# EAGLE board Group_08_Chiara (EAGLE 9.6.2)
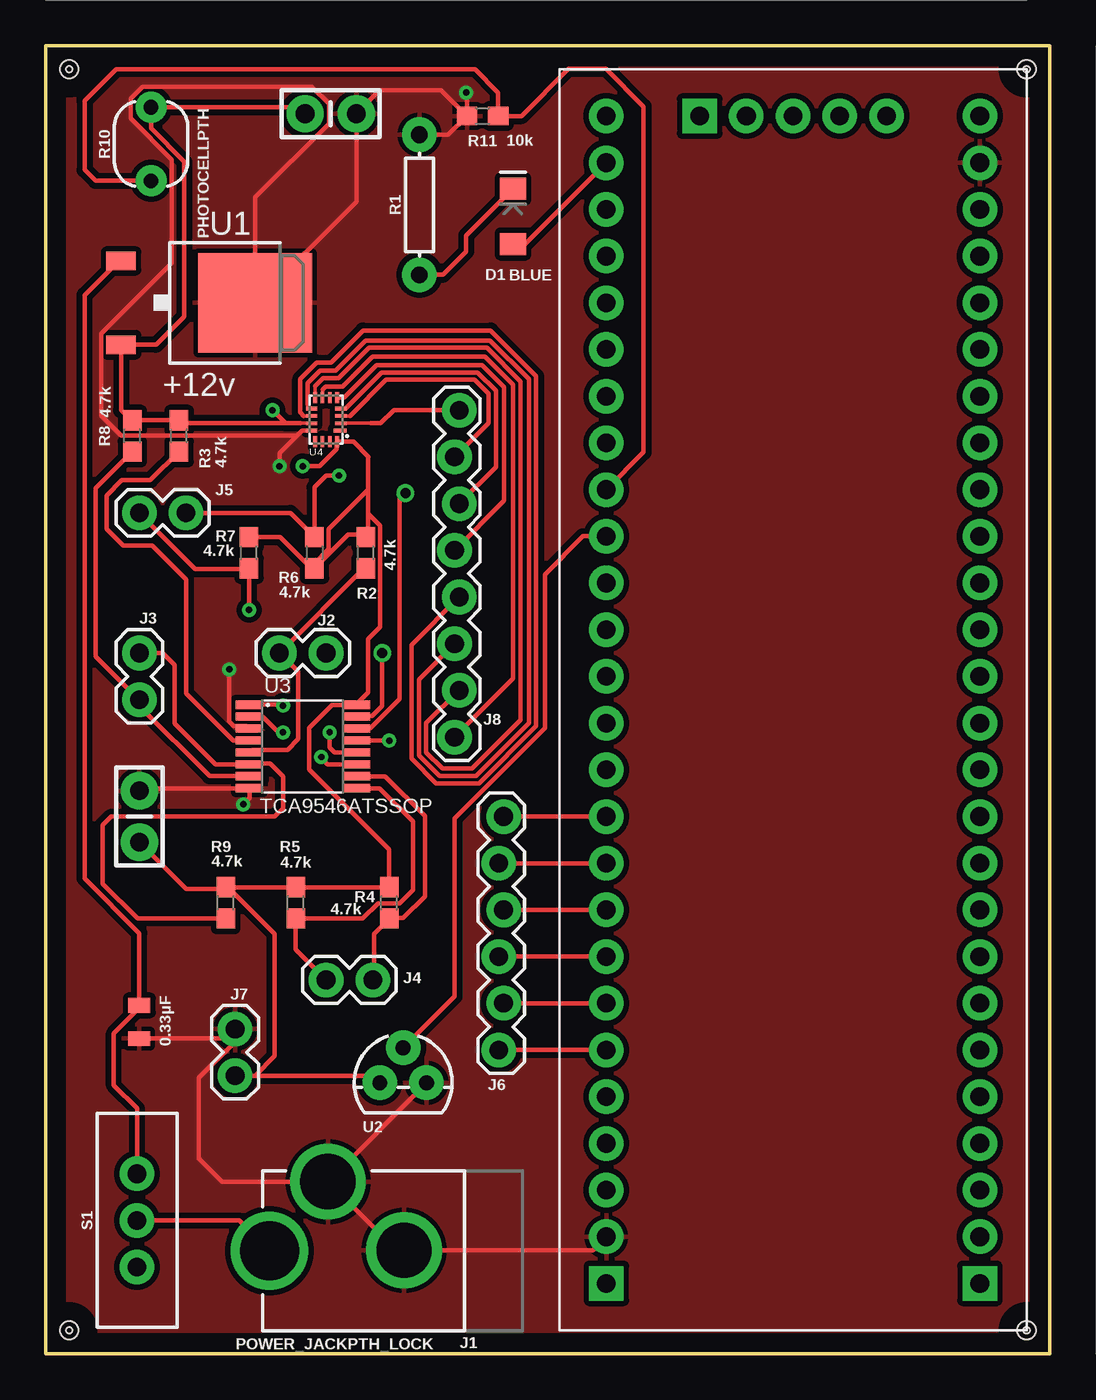
[diagram p0: board, top side]
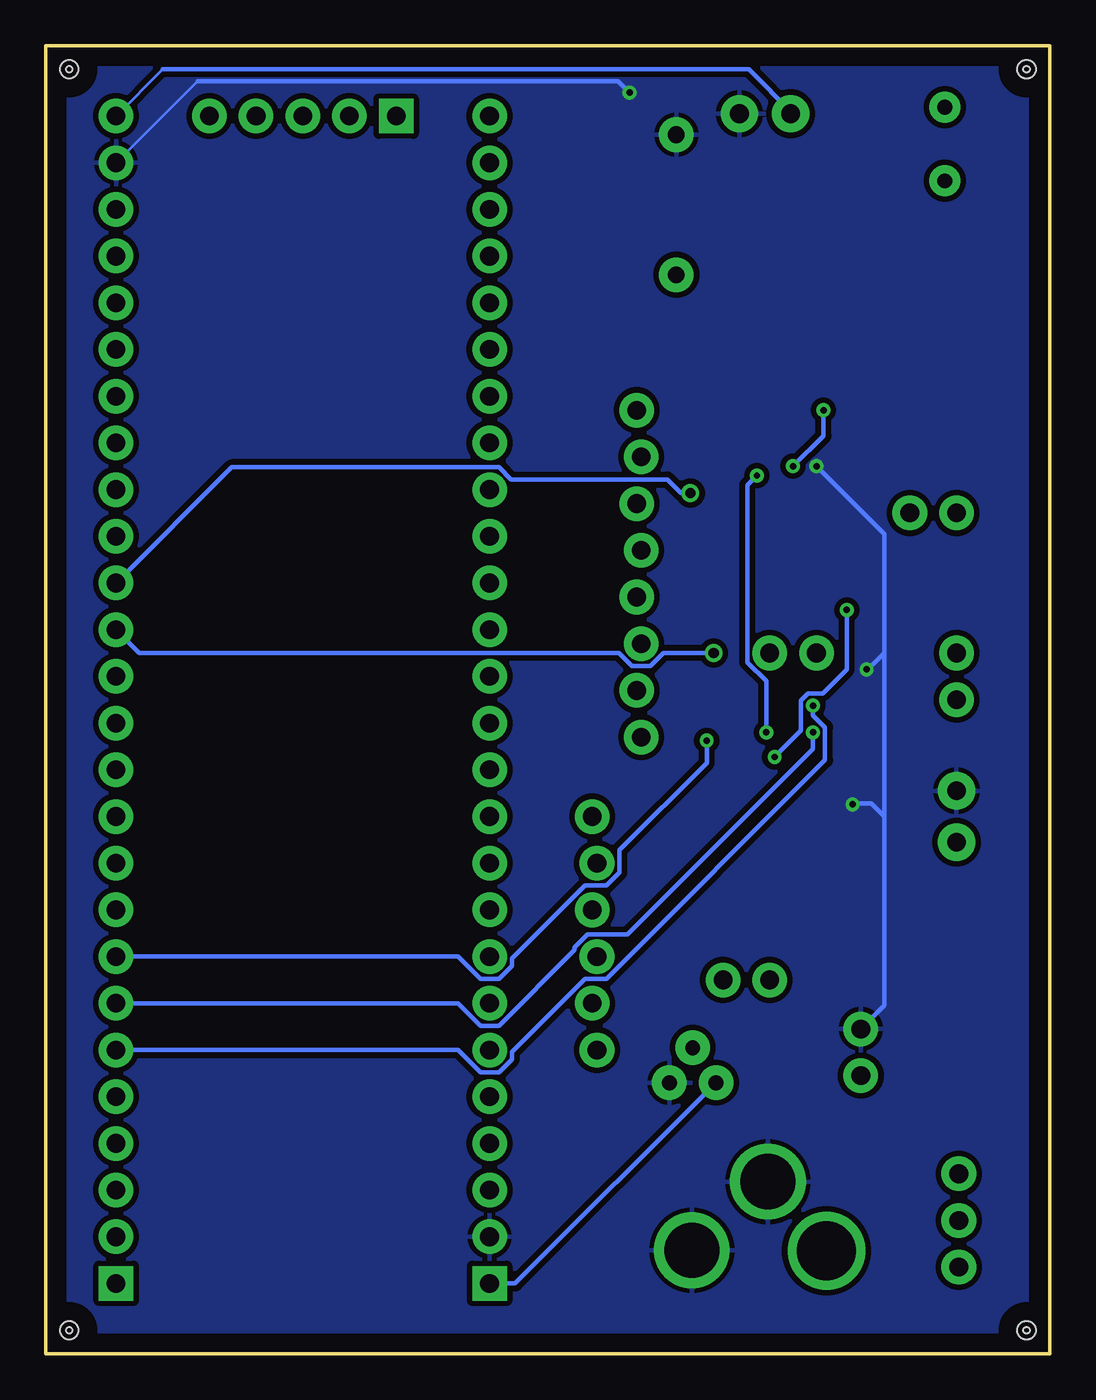
[diagram p1: board, bottom side, seen from below]

Size 54.61 x 71.12 mm. Coordinates in mm from the lower left corner, seen from the top.
Outline: 0,71.12 54.61,71.12 54.61,0 0,0 0,71.12
Copper layers (1*16): Top 0.035mm / dielectric 1.5mm / Bottom 0.035mm
Design rules "default *": minimum track width 6mil, minimum drill 0.35mm, track to track 6mil, track to pad 6mil, pad to pad 6mil, via to via 6mil, smd to smd 6mil, copper to edge 40mil, drill to drill 6mil, minimum pad ring 10mil, minimum via ring 8mil, stop-mask expansion 4mil, vias tented up to drill 0mil, thermal gap 10mil
Holes 0.35 mm at 1.27,69.85 53.34,69.85 53.34,1.27 1.27,1.27
Holes 1 mm at 1.27,69.85 1.27,1.27 53.34,1.27 53.34,69.85 53.34,69.85 53.34,1.27 1.27,1.27 1.27,69.85

## Footprints (pad centres in the part's own frame; a part is rotated, then mirrored left to right if it is on the bottom)
CAP-PTH-SMALL-KIT = drill 1.016 pad 2.032: 1 -1.397,0; 2 1.397,0
0805 = smd 0.8 x 1.2: 1 -0.9,0; 2 0.9,0
CY8CKIT-059_TARGET = drill 1.016 pad 1.876 square: 1 30.48,8.89; 27 30.48,-11.43; 71 -33.02,-6.35 | drill 1.016 pad 1.876: 2 27.94,8.89; 3 25.4,8.89; 4 22.86,8.89; 5 20.32,8.89; 6 17.78,8.89; 7 15.24,8.89; 8 12.7,8.89; 9 10.16,8.89; 10 7.62,8.89; 11 5.08,8.89; 12 2.54,8.89; 13 0,8.89; 14 -2.54,8.89; 15 -5.08,8.89; 16 -7.62,8.89; 17 -10.16,8.89; 18 -12.7,8.89; 19 -15.24,8.89; 20 -17.78,8.89; 21 -20.32,8.89; 22 -22.86,8.89; 23 -25.4,8.89; 24 -27.94,8.89; 25 -30.48,8.89; 26 -33.02,8.89; 28 27.94,-11.43; 29 25.4,-11.43; 30 22.86,-11.43; 31 20.32,-11.43; 32 17.78,-11.43; 33 15.24,-11.43; 34 12.7,-11.43; 35 10.16,-11.43; 36 7.62,-11.43; 37 5.08,-11.43; 38 2.54,-11.43; 39 0,-11.43; 40 -2.54,-11.43; 41 -5.08,-11.43; 42 -7.62,-11.43; 43 -10.16,-11.43; 44 -12.7,-11.43; 45 -15.24,-11.43; 46 -17.78,-11.43; 47 -20.32,-11.43; 48 -22.86,-11.43; 49 -25.4,-11.43; 50 -27.94,-11.43; 51 -30.48,-11.43; 52 -33.02,-11.43; 67 -33.02,3.81; 68 -33.02,1.27; 69 -33.02,-1.27; 70 -33.02,-3.81
LED-1206 = smd 1.2 x 1.4: A -1.5,0; C 1.5,0
POWER_JACK_PTH_LOCK = drill 2.997 pad 4.115: GND 0.025,6.557; GNDBREAK 3.762,10.7 | drill 3.2 pad 4.115: PWR 0,13.878
1X02 = drill 1.016 pad 1.88: 1 0,0; 2 2.54,0
1X06_LOCK = drill 1.016 pad 1.88: 1 0,0; 2 2.54,-0.254; 3 5.08,0; 4 7.62,-0.254; 5 10.16,0; 6 12.7,-0.254
1X08_LOCK = drill 1.016 pad 1.88: 1 0,0.127; 2 2.54,-0.127; 3 5.08,0.127; 4 7.62,-0.127; 5 10.16,0.127; 6 12.7,-0.127; 7 15.24,0.127; 8 17.78,-0.127
AXIAL-0.3 = drill 0.9 pad 1.88: P$1 -3.81,0; P$2 3.81,0
0603 = smd 1.1 x 1: 1 -0.85,0; 2 0.85,0
PHOTOCELL = drill 0.8 pad 1.676: 1 -2,0; 2 2,0
SWITCH_SPDT_PTH_11.6X4.0MM = drill 1.016 pad 1.88: 1 0,2.54; 2 0,0; 3 0,-2.54
TO-252 = smd 1 x 1.6: 1 -2.28,-4.8; 2 2.28,-4.8 | smd 5.4 x 6.2: 3 0,2.5
TO-92 = drill 0.813 pad 1.88: 1 -1.27,0; 2 0,1.905; 3 1.27,0
TSSOP16 = smd 1.5 x 0.45: 1 -2.9,2.275; 2 -2.9,1.625; 3 -2.9,0.975; 4 -2.9,0.325; 5 -2.9,-0.325; 6 -2.9,-0.975; 7 -2.9,-1.625; 8 -2.9,-2.275; 9 2.9,-2.275; 10 2.9,-1.625; 11 2.9,-0.975; 12 2.9,-0.325; 13 2.9,0.325; 14 2.9,0.975; 15 2.9,1.625; 16 2.9,2.275
QFN16 = smd 0.7 x 0.2: 1 -0.75,0.6 | smd 0.6 x 0.2: 2 -0.8,0.2; 3 -0.8,-0.2; 4 -0.8,-0.6; 9 0.8,-0.6; 10 0.8,-0.2; 11 0.8,0.2; 12 0.8,0.6 | smd 0.2 x 0.6: 5 -0.6,-1.2; 6 -0.2,-1.2; 7 0.2,-1.2; 8 0.6,-1.2; 13 0.6,1.2; 14 0.2,1.2; 15 -0.2,1.2; 16 -0.6,1.2

## Placement (x,y rotation side)
C1  0.1uF  [CAP-PTH-SMALL-KIT]  15.49,67.44 0 top
C2  0.33µF  [0805]  5.08,18.03 270 top
C3  0.1uF  [CAP-PTH-SMALL-KIT]  5.08,29.21 90 top
CY8CKIT059-TARGET  CY8CKIT-059_TARGET  [CY8CKIT-059_TARGET]  41.91,34.29 270 top
D1  BLUE  [LED-1206]  25.4,61.85 90 top
J1  POWER_JACKPTH_LOCK  [POWER_JACK_PTH_LOCK]  26.04,5.59 90 top
J2  [1X02]  15.24,38.1 180 top
J3  [1X02]  5.08,38.1 270 top
J4  [1X02]  15.24,20.32 0 top
J5  [1X02]  5.08,45.72 0 top
J6  [1X06_LOCK]  24.64,16.51 90 top
J7  [1X02]  10.29,17.65 270 top
J8  [1X08_LOCK]  22.35,33.53 90 top
R1  [AXIAL-0.3]  20.32,62.48 90 top
R2  4.7k  [0603]  17.4,43.56 90 top
R3  4.7k  [0603]  7.24,49.91 90 top
R4  4.7k  [0603]  18.67,24.51 90 top
R5  4.7k  [0603]  13.59,24.51 90 top
R6  4.7k  [0603]  14.61,43.56 270 top
R7  4.7k  [0603]  11.05,43.56 90 top
R8  4.7k  [0603]  4.7,49.91 90 top
R9  4.7k  [0603]  9.78,24.51 90 top
R10  PHOTOCELLPTH  [PHOTOCELL]  5.71,65.79 90 top
R11  10k  [0603]  23.75,67.31 0 top
S1  [SWITCH_SPDT_PTH_11.6X4.0MM]  4.95,7.24 0 top
U1  +12v  [TO-252]  8.89,57.15 270 top
U2  [TO-92]  19.43,14.73 0 top
U3  TCA9546ATSSOP  [TSSOP16]  13.97,33.02 0 top
U4  TMUX1208  [QFN16]  15.24,50.8 180 top

## Library data of the parts
C1 C3 = SparkFun-Capacitors; PROD_ID: CAP-08370
C2 = SparkFun-Capacitors; PROD_ID: CAP-08469
CY8CKIT059-TARGET = CY8KIT-059
D1 = SparkFun-LED; PROD_ID: DIO-09911
J1 = SparkFun-Connectors; PROD_ID: CONN-08197; SF_ID: PRT-00119
J2-J8 = SparkFun-Connectors
R1 = SparkFun-Resistors
R2-R9 = SparkFun-Resistors; PROD_ID: RES-07857
R10 = SparkFun-Sensors; PROD_ID: COMP-09129; SF_ID: SEN-09088
R11 = SparkFun-Resistors; PROD_ID: RES-00824
S1 = SparkFun-Switches; PROD_ID: SWCH-08261; SF_SKU: COM-00102
U1 = SparkFun-IC-Power; PROD_ID: VREG-12370
U2 = SparkFun-Sensors; PROD_ID: IC-09880; SF_ID: SEN-10988
U3 U4 = Group_08_Library

## Nets
5V: C1.1 C3.1 CY8CKIT059-TARGET.26 CY8CKIT059-TARGET.27 J7.2 R2.2 R3.2 R4.2 R5.2 R6.2 R7.2 R8.2 R9.2 R10.2 U1.2 U2.1 U3.16 U4.11 U4.16
12V: C2.1 S1.1 U1.1
GND: C1.2 C2.2 C3.2 CY8CKIT059-TARGET.25 CY8CKIT059-TARGET.28 J1.GND J1.GNDBREAK J7.1 R1.P$2 R11.1 U1.3 U2.3 U3.3 U3.8 U4.12
I2C_A0: CY8CKIT059-TARGET.6 U3.1
I2C_A1: CY8CKIT059-TARGET.7 U3.2
I2C_A2: CY8CKIT059-TARGET.8 U3.13
I2C_SCL: CY8CKIT059-TARGET.16 U3.14
I2C_SCL_0: J2.2 R2.1 U3.5
I2C_SCL_1: J3.2 R8.1 U3.7
I2C_SCL_2: J4.2 R4.1 U3.10
I2C_SCL_3: J5.2 R6.1 U3.12
I2C_SDA: CY8CKIT059-TARGET.15 U3.15
I2C_SDA_0: J2.1
I2C_SDA_1: J3.1 R9.1 U3.6
I2C_SDA_2: J4.1 R5.1 U3.9
I2C_SDA_3: J5.1 R7.1 U3.11
IDC_SDA_0: R3.1 U3.4
MUX_A0/1.3C: U4.15
MUX_A0/2.3C: CY8CKIT059-TARGET.24
MUX_A1/1.4C: U4.14
MUX_A1/2.3C: CY8CKIT059-TARGET.23
MUX_A2/1.4C: U4.13
MUX_A2/2.3C: CY8CKIT059-TARGET.22
MUX_OUT/1.4C: U4.6
MUX_OUT/2.5C: CY8CKIT059-TARGET.21
N$2: J1.PWR S1.2
N$10: J8.1 U4.7
N$11: J8.2 U4.8
N$12: J8.3 U4.9
N$13: J8.4 U4.10
N$14: J8.5 U4.5
N$16: J8.6 U4.4
N$17: J8.7 U4.3
N$18: J8.8 U4.2
N$19: CY8CKIT059-TARGET.37 J6.6
N$20: CY8CKIT059-TARGET.32 J6.1
N$21: CY8CKIT059-TARGET.33 J6.2
N$22: CY8CKIT059-TARGET.34 J6.3
N$23: CY8CKIT059-TARGET.35 J6.4
N$24: CY8CKIT059-TARGET.36 J6.5
N$25: D1.C R1.P$1
N$26: CY8CKIT059-TARGET.51 D1.A
PHOTO_OUT: CY8CKIT059-TARGET.44 R10.1 R11.2
TEMP_OUT: CY8CKIT059-TARGET.43 U2.2

## Tracks (layer width: path | path; a pad name or v marks a point on that pad's centre or on a via)
5V  (via drill 0.35)
  Top 0.203: U4.11 13.85,50.6 | 17.53,48.77 17.56,48.77
  Top 0.254: R9.2 R5.2 R4.2 18.67,27.41 14.32,31.77 14.32,34.03 15.56,35.28 16.87,35.28 U3.16 17.53,35.95 17.53,38.85 18.18,39.5 18.18,45.03 17.53,45.68 | C3.1 7.62,25.27 9.69,25.27 R9.2 | 13.03,50.6 7.24,50.6 R3.2 R8.2 4.64,50.76 4.09,51.31 U1.2 6,54.87 6.04,54.92 7.53,56.41 7.53,64.82 5.71,66.64 R10.2 13.75,67.79 C1.1 | 17.56,48.77 16.73,49.6 U4.16 15.82,49.58 15.82,49.18 14.9,48.26 v13.97,48.26 | 17.53,48.77 17.53,46.99 | 17.53,46.99 17.53,45.68 | R6.2 14.61,42.54 12.74,44.41 R7.2 | R6.2 16.43,44.54 17.53,44.54 | U2.1 17.78,15.11 J7.2 11.37,15.11 12.45,16.19 12.45,22.82 9.91,25.36 R9.2 | 17.53,45.68 17.53,44.54 | 17.53,44.54 R2.2 | 17.53,46.99 15.38,44.85 15.38,43.74 14.61,42.97 R6.2 | v12.32,51.31 13.03,50.6 | 13.03,50.6 13.85,50.6
  Bottom 0.152: 48.26,69.85 CY8CKIT059-TARGET.26
  Bottom 0.254: C1.1 13.97,67.44 16.38,69.85 48.26,69.85 | CY8CKIT059-TARGET.27 29.08,3.81 U2.1 | v13.97,48.26 12.32,49.91 v12.32,51.31
12V
  Top 0.254: U1.1 4.09,59.56 2.1,57.57 2.1,25.84 5.08,22.86 C2.1 5.08,18.8 3.69,17.41 3.69,14.59 4.95,13.33 S1.1
GND  (via drill 0.35)
  Top 0.152: v22.86,68.58 22.9,68.54
  Top 0.254: U3.8 | U3.8 5.21,30.73 C3.2 | R1.P$2 21.88,66.29 R11.1 | R11.1 21.5,68.71 18.16,68.71 C1.2 16.89,62.65 U1.3 11.39,62.9 15.39,66.9 15.39,67.97 14.46,68.9 5.25,68.9 4.6,68.25 4.6,67.18 6.83,64.94 6.83,59.31 3.01,55.49 3.01,51 4.08,49.93 13.66,49.93 | 22.9,68.54 R11.1 | CY8CKIT059-TARGET.28 29.74,5.61 J1.GND 19.07,5.61 J1.GNDBREAK | J1.GNDBREAK 9.57,9.35 8.32,10.6 8.32,14.99 10.29,16.96 J7.1 9.77,17.13 C2.2 | J1.GNDBREAK 20.7,14.72 U2.3 | 13.66,49.93 13.93,50.19 U4.12 | v12.7,48.26 12.7,48.97 13.66,49.93 | U3.3 10.92,34.14 10.2,34.14 9.97,34.38 v9.97,37.21 | v10.73,29.87 11.07,30.21 U3.8
  Bottom 0.152: CY8CKIT059-TARGET.25 46.35,69.22
  Bottom 0.254: v22.86,68.58 23.5,69.22 46.35,69.22 | 9.02,38.1 9.02,44.58 v12.7,48.26 | 9.02,38.1 9.02,29.21 | 9.02,29.21 9.02,18.92 J7.1 | v9.97,37.21 9.91,37.21 9.02,38.1 | 9.02,29.21 9.72,29.91 10.69,29.91 v10.73,29.87
  pour Top (isolate 0.305): 0,71.12 54.61,71.12 54.61,0 0,0
  pour Bottom (isolate 0.305): 0,71.12 54.61,71.12 54.61,0 0,0
I2C_A0  (via drill 0.35)
  Top 0.254: v12.89,35.24 12.84,35.29 U3.1
  Bottom 0.254: CY8CKIT059-TARGET.6 32.2,16.51 30.98,15.29 29.98,15.29 29.26,16.01 29.26,16.4 25.3,20.37 24.13,20.37 12.23,32.27 12.23,34.05 12.89,34.71 v12.89,35.24
I2C_A1  (via drill 0.35)
  Top 0.254: U3.2 11.09,34.63 11.81,34.63 12.65,33.78 v12.89,33.78
  Bottom 0.254: v12.89,33.78 12.89,32.89 22.97,22.81 25.14,22.81 25.86,22.1 25.86,21.95 29.98,17.83 30.98,17.83 32.2,19.05 CY8CKIT059-TARGET.7
I2C_A2  (via drill 0.35)
  Top 0.254: v18.67,33.34 16.88,33.34 U3.13
  Bottom 0.254: CY8CKIT059-TARGET.8 32.2,21.59 30.98,20.37 29.98,20.37 29.26,21.09 29.26,21.48 25.3,25.45 24.13,25.45 23.42,26.17 23.42,27.38 18.67,32.13 v18.67,33.34
I2C_SCL  (via drill 0.55)
  Top 0.254: U3.14 17.64,33.99 19.24,35.59 19.24,46.54 19.5,46.8 v19.56,46.8
  Bottom 0.254: v19.56,46.8 20.07,46.8 20.82,47.55 29.32,47.55 29.98,48.21 44.5,48.21 CY8CKIT059-TARGET.16
I2C_SCL_0
  Top 0.254: R2.1 17.31,42.71 J2.2 13.72,37.08 13.72,33.41 13.14,32.84 11.22,32.84 U3.5
I2C_SCL_1
  Top 0.254: U3.7 11.07,31.41 8.9,31.41 5.08,35.23 J3.2 2.72,37.92 2.72,47.08 R8.1
I2C_SCL_2
  Top 0.254: J4.2 17.84,20.32 17.84,22.84 R4.1 18.69,23.68 19.43,23.68 20.62,24.87 20.62,29.24 18.46,31.39 U3.10
I2C_SCL_3  (via drill 0.35)
  Top 0.254: J5.2 13.3,45.72 R6.1 14.61,47.12 15.24,47.75 v15.94,47.75 | U3.12 15.69,32.7 15.43,32.96 v15.43,33.78
  Bottom 0.254: v15.43,33.78 15.43,36.57 16.46,37.59 16.46,47.23 v15.94,47.75
I2C_SDA  (via drill 0.55)
  Top 0.254: U3.15 16.89,34.66 17.74,34.66 18.29,35.22 v18.29,38.1
  Bottom 0.254: CY8CKIT059-TARGET.15 49.53,38.1 23.44,38.1 22.73,37.39 21.72,37.39 21.01,38.1 v18.29,38.1
I2C_SDA_1
  Top 0.254: J3.1 6.35,38.11 7,37.46 7,34.28 9.23,32.04 U3.6 11.12,32.09 12.19,32.09 12.89,31.39 12.89,29.66 12.45,29.21 3.56,29.21 3.09,28.74 3.09,25.55 4.98,23.66 R9.1
I2C_SDA_2
  Top 0.254: J4.1 13.59,21.97 R5.1 17.22,23.66 18.05,24.49 19.24,24.49 19.96,25.2 19.96,28.93 18.14,30.75 U3.9
I2C_SDA_3  (via drill 0.35)
  Top 0.254: 11.05,42.67 R7.1 | J5.1 8.13,42.67 11.05,42.67 | U3.11 15.33,32.04 14.92,32.45 v14.97,32.45 | v11.05,40.45 11.05,42.67
  Bottom 0.254: v14.97,32.45 13.55,33.88 13.55,35.52 13.16,35.9 12.36,35.9 11.05,37.21 v11.05,40.45
IDC_SDA_0
  Top 0.254: U3.4 10.19,33.34 7.62,35.91 7.62,42.1 5.78,43.94 4.19,43.94 3.3,44.83 3.3,46.67 4.13,47.5 5.68,47.5 R3.1
N$2
  Top 0.254: S1.2 10.51,7.24 J1.PWR
N$10
  Top 0.203: 15.06,52.42 15.04,52.39 U4.7
  Top 0.254: J8.1 25.4,36.7 25.4,52.7 23.88,54.23 17.78,54.23 16.13,52.58 15.22,52.58 15.06,52.42
N$11
  Top 0.203: U4.8 14.64,52.61
  Top 0.254: 14.64,52.61 15.08,53.05 15.91,53.05 17.56,54.7 23.98,54.7 25.81,52.87 25.81,34.45 23.18,31.83 21.57,31.83 20.69,32.7 20.69,34.29 J8.2
N$12
  Top 0.203: U4.9 14.23,51.61
  Top 0.254: U4.9 | 14.23,51.61 14.23,52.78 14.91,53.45 15.75,53.45 17.4,55.1 24.15,55.1 26.26,52.99 26.26,34.29 23.39,31.42 21.4,31.42 20.28,32.54 20.28,36.66 J8.3
N$13
  Top 0.203: U4.10 14.02,51
  Top 0.254: 14.02,51 13.83,51.2 13.83,53.01 14.72,53.9 15.5,53.9 17.24,55.64 24.19,55.64 26.67,53.16 26.67,34.12 23.56,31.01 21.23,31.01 19.88,32.37 19.88,38.54 J8.4
N$14
  Top 0.254: U4.5 16.22,52 17.99,53.77 23.71,53.77 24.93,52.56 24.93,46.39 J8.5
N$16
  Top 0.203: U4.4 16.29,51.4
  Top 0.254: J8.6 24.47,48.22 24.47,52.38 23.48,53.36 18.26,53.36 16.29,51.4
N$17
  Top 0.203: U4.3 16.55,51
  Top 0.254: J8.7 24.07,50.61 24.07,52.21 23.31,52.96 18.51,52.96 16.55,51
N$18
  Top 0.203: U4.2 16.51,50.6 17.65,50.6
  Top 0.254: J8.8 18.92,51.31 18.22,50.6 17.65,50.6
N$19
  Top 0.254: J6.6 CY8CKIT059-TARGET.37
N$20
  Top 0.254: J6.1 CY8CKIT059-TARGET.32
N$21
  Top 0.254: CY8CKIT059-TARGET.33 J6.2
N$22
  Top 0.254: J6.3 CY8CKIT059-TARGET.34
N$23
  Top 0.254: CY8CKIT059-TARGET.35 J6.4
N$24
  Top 0.254: J6.5 CY8CKIT059-TARGET.36
N$25
  Top 0.254: R1.P$1 21.59,58.67 22.86,59.94 22.86,60.81 D1.C
N$26
  Top 0.254: CY8CKIT059-TARGET.51 26.06,60.35 D1.A
PHOTO_OUT
  Top 0.254: CY8CKIT059-TARGET.44 32.51,49.02 32.51,67.82 30.46,69.87 28.43,69.87 25.87,67.31 R11.2 24.6,68.58 23.33,69.85 3.81,69.85 2.1,68.13 2.1,64.39 2.7,63.79 R10.1
TEMP_OUT
  Top 0.254: U2.2 22.23,19.44 22.23,29.11 27.04,33.92 27.08,33.95 27.14,34.02 27.14,42.38 29.21,44.45 CY8CKIT059-TARGET.43